# Altium PCB RST32.PcbDoc
Units mm, origin at the board's own origin, x right, y up, seen from the top; angles counter-clockwise.
Board outline 25.5 x 18 mm, 2 copper layers (Top Layer, Bottom Layer); 51 components, 41 nets, 174 pads, 0 vias.
Unrouted connection lines stored in the file: 116.
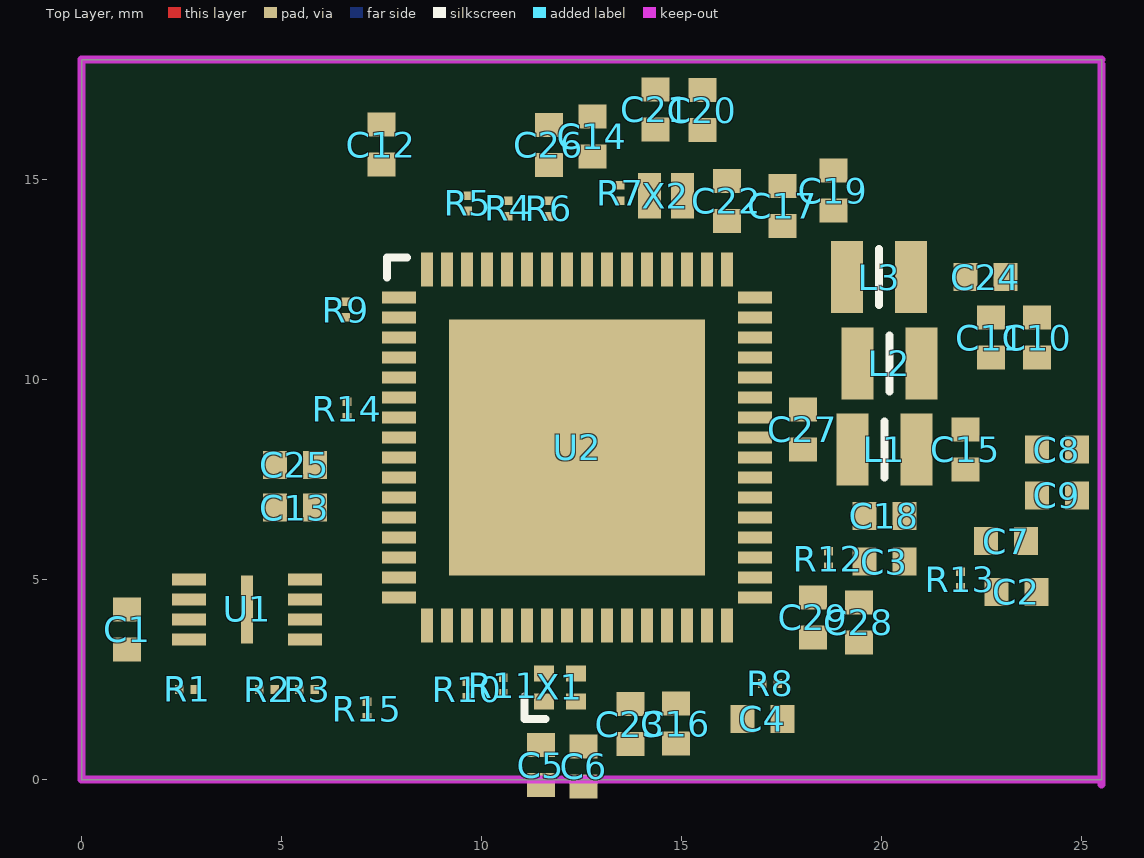
[diagram p0: Top Layer view]
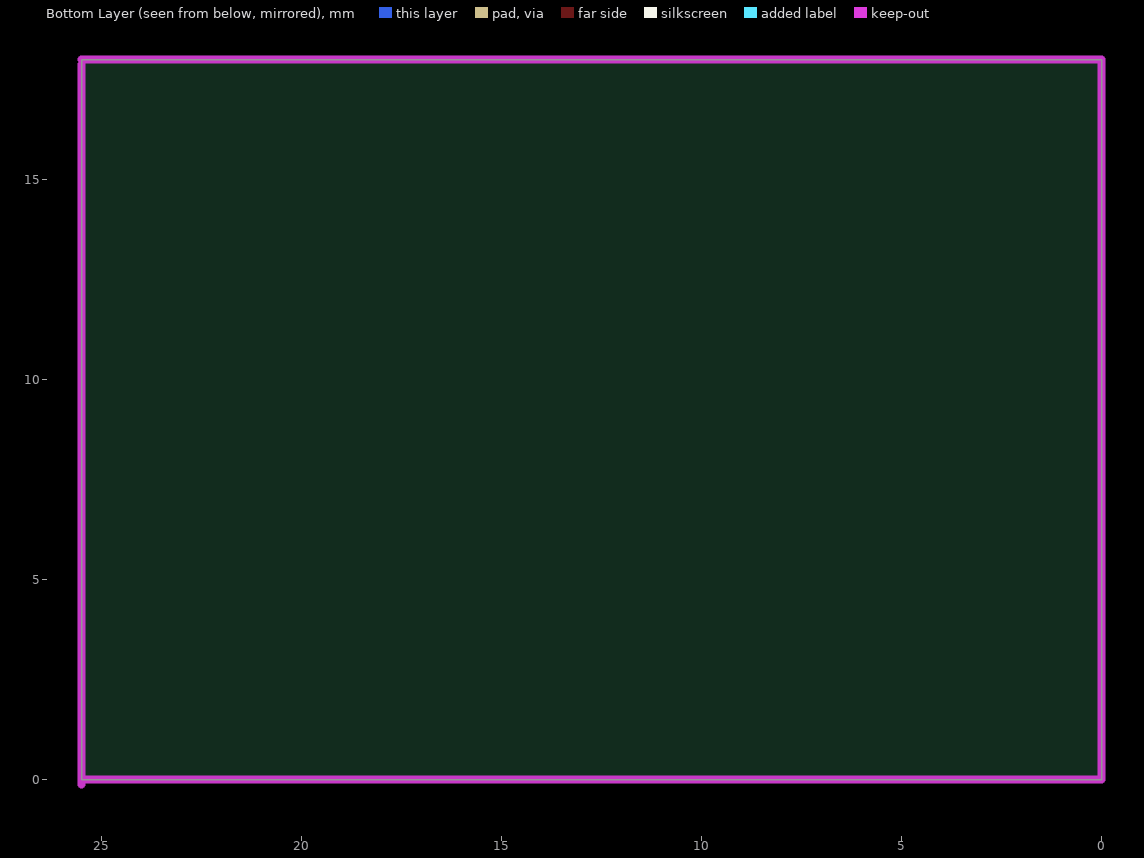
[diagram p1: Bottom Layer view, seen from below]

## Layer stack, top to bottom
Top Solder: solder mask 0.0102, Solder Resist, Dk 3.5
Top Layer: signal copper 0.0356
Dielectric 1: dielectric 0.32, FR-4, Dk 4.8
Bottom Layer: signal copper 0.0356
Bottom Solder: solder mask 0.0102, Solder Resist, Dk 3.5

## Board outline
0,0 25.5,0 25.5,18 0,18

## Design rules (kind name [scope] priority, off if disabled: settings)
Clearance [All] p1: gap=0.254 ignorepadtopadclearanceinfootprint=FALSE except(0.152: SMDPad-SMDPad)
ComponentClearance [All] p1: gap=0.152 collisioncheckmode=3 verticalgap=0.254 showdistances=FALSE
PolygonConnect [All] p1: connectstyle=Relief reliefconductorwidth=0.254 reliefentries=4 polygonreliefangle="90 Angle" airgapwidth=0.254
RoomDefinition CC3135_WIFI [InComponentClass('CC3135_WIFI')] p1: confinementstyle=ConfineIn formatcopy=TRUE lockcomponents=FALSE outline 0.507,-0.727 25.526,-0.727 25.526,17.815 0.507,17.815
RoutingVias [All] p1: holewidth=0.711 width=1.27 viastyle="Through Hole" minholewidth=0.711 minwidth=1.27 maxholewidth=0.711 maxwidth=1.27
SolderMaskExpansion [All] p1: expansion=0.102 istentingtop=FALSE
SupplyNets "Schematic Supply Nets_6" [InNet('WIFI_VDD_RAM')] p1: voltage=0.000
SupplyNets "Schematic Supply Nets_5" [InNet('GND')] p2: voltage=0.000
SupplyNets "Schematic Supply Nets_4" [InNet('WIFI_VDD_PLL')] p3: voltage=0.000
SupplyNets "Schematic Supply Nets_3" [InNet('WIFI_VDD_DIG')] p4: voltage=0.000
SupplyNets "Schematic Supply Nets_2" [InNet('3V3')] p5: voltage=0.000
SupplyNets "Schematic Supply Nets_1" [InNet('WIFI_VDD_ANA')] p6: voltage=0.000
SupplyNets "Schematic Supply Nets" [InNet('WIFI_VDD_PA')] p7: voltage=0.000
Width [All] p1: maxlimit=0.254 minlimit=0.254 preferedwidth=0.254
29 further rules are at their usual default settings.

## Components (designator, comment, footprint, x,y, rotation, side; value= is the part's Value field where it differs from the comment)
C1 "MLCC_0402_(1005)" MLCC_0402_(1005) 1.135,3.754 r90 top
C2 "MLCC_0402_(1005)" MLCC_0402_(1005) 23.368,4.691 r0 top
C3 "MLCC_0402_(1005)" MLCC_0402_(1005) 20.066,5.453 r180 top
C4 "MLCC_0402_(1005)" MLCC_0402_(1005) 17.018,1.516 r0 top
C5 "MLCC_0402_(1005)" MLCC_0402_(1005) 11.484,0.363 r90 top
C6 "MLCC_0402_(1005)" MLCC_0402_(1005) 12.548,0.332 r90 top
C7 "MLCC_0402_(1005)" MLCC_0402_(1005) 23.114,5.961 r0 top
C8 "MLCC_0402_(1005)" MLCC_0402_(1005) 24.384,8.247 r0 top
C9 "MLCC_0402_(1005)" MLCC_0402_(1005) 24.384,7.104 r0 top
C10 "MLCC_0402_(1005)" MLCC_0402_(1005) 23.889,11.047 r270 top
C11 "MLCC_0402_(1005)" MLCC_0402_(1005) 22.733,11.049 r270 top
C12 "MLCC_0402_(1005)" MLCC_0402_(1005) 7.493,15.875 r90 top
C13 "MLCC_0402_(1005)" MLCC_0402_(1005) 5.334,6.801 r180 top
C14 "MLCC_0402_(1005)" MLCC_0402_(1005) 12.769,16.083 r90 top
C15 "MLCC_0402_(1005)" MLCC_0402_(1005) 22.098,8.255 r90 top
C16 "MLCC_0402_(1005)" MLCC_0402_(1005) 14.859,1.397 r90 top
C17 "MLCC_0402_(1005)" MLCC_0402_(1005) 17.526,14.343 r90 top
C18 "MLCC_0402_(1005)" MLCC_0402_(1005) 20.066,6.596 r180 top
C19 "MLCC_0402_(1005)" MLCC_0402_(1005) 18.796,14.724 r90 top
C20 "MLCC_0402_(1005)" MLCC_0402_(1005) 15.519,16.736 r90 top
C21 "MLCC_0402_(1005)" MLCC_0402_(1005) 14.351,16.756 r90 top
C22 "MLCC_0402_(1005)" MLCC_0402_(1005) 16.129,14.47 r90 top
C23 "MLCC_0402_(1005)" MLCC_0402_(1005) 13.716,1.389 r270 top
C24 "MLCC_0402_(1005)" MLCC_0402_(1005) 22.598,12.565 r180 top
C25 "MLCC_0402_(1005)" MLCC_0402_(1005) 5.334,7.866 r180 top
C26 "MLCC_0402_(1005)" MLCC_0402_(1005) 11.684,15.867 r90 top
C27 "MLCC_0402_(1005)" MLCC_0402_(1005) 18.034,8.755 r270 top
C28 "MLCC_0402_(1005)" MLCC_0402_(1005) 19.431,3.929 r270 top
C29 "MLCC_0402_(1005)" MLCC_0402_(1005) 18.288,4.056 r270 top
L1 "LQM2MPN" LQM2MPN 20.066,8.247 r180 top value=2.2uH
L2 "LQM2MPN" LQM2MPN 20.193,10.406 r0 top value=1uH
L3 "LQM2MPN" LQM2MPN 19.939,12.565 r0 top value=2.2uH
R1 "RES_01005_(0402)" RES_01005_(0402) 2.635,2.254 r0 top
R2 "RES_01005_(0402)" RES_01005_(0402) 4.635,2.254 r0 top
R3 "RES_01005_(0402)" RES_01005_(0402) 5.635,2.254 r0 top
R4 "RES_01005_(0402)" RES_01005_(0402) 10.668,14.282 r90 top
R5 "RES_01005_(0402)" RES_01005_(0402) 9.652,14.409 r90 top
R6 "RES_01005_(0402)" RES_01005_(0402) 11.684,14.282 r90 top
R7 "RES_01005_(0402)" RES_01005_(0402) 13.462,14.663 r90 top
R8 "RES_01005_(0402)" RES_01005_(0402) 17.21,2.405 r0 top
R9 "RES_01005_(0402)" RES_01005_(0402) 6.604,11.75 r270 top
R10 "RES_01005_(0402)" RES_01005_(0402) 9.635,2.254 r90 top
R11 "RES_01005_(0402)" RES_01005_(0402) 10.541,2.351 r90 top
R12 "RES_01005_(0402)" RES_01005_(0402) 18.669,5.519 r90 top
R13 "RES_01005_(0402)" RES_01005_(0402) 21.971,5.007 r90 top
R14 "RES_01005_(0402)" RES_01005_(0402) 6.635,9.254 r90 top
R15 "RES_01005_(0402)" RES_01005_(0402) 7.135,1.754 r90 top
U1 "MX25R1635F" MX25R1635FZU 4.135,4.254 r0 top value=16Mbit
U2 "CC3135RNMRGKR" QFN50P900X900X100-65N-D 12.385,8.304 r0 top
X1 "ABM13W" ABM13W 11.957,2.309 r0 top
X2 "ECX-1210" ECX-1210 14.605,14.597 r0 top

## Footprints (in the part's own frame and the unit in brackets; to place one, negate y for a bottom-side part, rotate by r counter-clockwise, add the part's x,y. Pads: shape width x height; smd on the part's side, far side on the other; paste and mask are expansions set on the pad)
ABM13W [mm]
  rect 0.5x0.4 smd mask+0.05: 1(-0.4,-0.35) 2(0.4,-0.35) 3(0.4,0.35) 4(-0.4,0.35)
  silkscreen extent -0.89,-0.79 -0.36,-0.23, body extent -0.6,-0.5 0.6,0.5, height 0.28
ECX-1210 [mm]
  rect 0.575x1.14 smd mask+0.05: 1(-0.413,0) 2(0.413,0)
  body extent -0.6,-0.5 0.6,0.5, height 0.5
LQM2MPN [mm] "0806 Chip Inductor"
  rect 0.8x1.8 smd: 1(-0.8,0) 2(0.8,0)
  silkscreen extent 0,-0.7 0,0.7, body extent -1,-0.8 1,0.8, height 0.9
MLCC_0402_(1005) [mm]
  rect 0.6x0.7 smd: 1(-0.5,0) 2(0.5,0)
  body extent -0.58,-0.32 0.58,0.33, height 0.65
MX25R1635FZU [mm] "1.65V~3.6V 100,000 Cycles 16Mbit 20 Years 3.2ms 80MHz SPI USON-8-EP(2x3) NOR FLASH ROHS"
  rect 0.85x0.3 smd mask+0.05: 1(-1.45,0.75) 2(-1.45,0.25) 3(-1.45,-0.25) 4(-1.45,-0.75) 5(1.45,-0.75) 6(1.45,-0.25) 7(1.45,0.25) 8(1.45,0.75)
  rect 0.3x1.7 smd mask+0.05: 9(0,0)
  body extent -1.55,-1 1.55,1, height 0.6
QFN50P900X900X100-65N-D [mm]
  rect 0.85x0.3 smd mask+0.05: 1(-4.45,3.75) 2(-4.45,3.25) 3(-4.45,2.75) 4(-4.45,2.25) 5(-4.45,1.75) 6(-4.45,1.25) 7(-4.45,0.75) 8(-4.45,0.25) 9(-4.45,-0.25) 10(-4.45,-0.75) 11(-4.45,-1.25) 12(-4.45,-1.75) 13(-4.45,-2.25) 14(-4.45,-2.75) 15(-4.45,-3.25) 16(-4.45,-3.75) 33(4.45,-3.75) 34(4.45,-3.25) 35(4.45,-2.75) 36(4.45,-2.25) 37(4.45,-1.75) 38(4.45,-1.25) 39(4.45,-0.75) 40(4.45,-0.25) 41(4.45,0.25) 42(4.45,0.75) 43(4.45,1.25) 44(4.45,1.75) 45(4.45,2.25) 46(4.45,2.75) 47(4.45,3.25) 48(4.45,3.75)
  rect 0.3x0.85 smd mask+0.05: 17(-3.75,-4.45) 18(-3.25,-4.45) 19(-2.75,-4.45) 20(-2.25,-4.45) 21(-1.75,-4.45) 22(-1.25,-4.45) 23(-0.75,-4.45) 24(-0.25,-4.45) 25(0.25,-4.45) 26(0.75,-4.45) 27(1.25,-4.45) 28(1.75,-4.45) 29(2.25,-4.45) 30(2.75,-4.45) 31(3.25,-4.45) 32(3.75,-4.45) 49(3.75,4.45) 50(3.25,4.45) 51(2.75,4.45) 52(2.25,4.45) 53(1.75,4.45) 54(1.25,4.45) 55(0.75,4.45) 56(0.25,4.45) 57(-0.25,4.45) 58(-0.75,4.45) 59(-1.25,4.45) 60(-1.75,4.45) 61(-2.25,4.45) 62(-2.75,4.45) 63(-3.25,4.45) 64(-3.75,4.45)
  rect 6.4x6.4 smd mask+0.05: 65(0,0)
  silkscreen extent -4.75,4.25 -4.25,4.75, body extent -4.5,-4.5 4.5,4.5, height 1
RES_01005_(0402) [mm] "Chip Resistor, 2-Leads, Body 0.40x0.20mm, IPC High Density"
  rect 0.215x0.22 smd mask+0.05: 1(-0.192,0) 2(0.193,0)
  body extent -0.21,-0.11 0.21,0.11, height 0.16

## Part data
C1 C13 C14 C16 C18 C22 C23 C25 C26: Capacitance=0.1uF, Package=0402, Voltage=10V, Supplier 1=JLCPCB
C2 C3: Capacitance=100pF, Package=0402, Voltage=10V, Supplier 1=JLCPCB
C4: Capacitance=10nF, Package=0402, Voltage=10V, Supplier 1=JLCPCB
C5 C6: Capacitance=6pF, Package=0402, Voltage=10V, Supplier 1=JLCPCB
C7 C8 C10: Capacitance=4.7uF, Dielectric=X5R, Manufacturer 1="Samsung Electro-Mechanics", Manufacturer Part Number 1=CL05A475MQ5NRNC, Package=0402, Supplier Part Number 1=C307423, Voltage=6.3V, Supplier 1=JLCPCB
C9: Capacitance=0.6pF, Package=0402, Voltage=6.3V, Supplier 1=JLCPCB
C11: Capacitance=0.5pF, Package=0402, Voltage=6.3V, Supplier 1=JLCPCB
C12: Capacitance=10uF, Package=0402, Voltage=6.3V, Supplier 1=JLCPCB
C15 C24: Capacitance=10uF, Package=0402, Voltage=10V, Supplier 1=JLCPCB
C17: Capacitance=0.2pF, Package=0402, Voltage=10V, Supplier 1=JLCPCB
C19: Capacitance=0.6pF, Package=0402, Voltage=10V, Supplier 1=JLCPCB
C20 C21: Capacitance=15pF, Package=0402, Voltage=10V, Supplier 1=JLCPCB
C27 C28: Capacitance=22uF, Package=0402, Voltage=10V, Supplier 1=JLCPCB
C29: Capacitance=1uF, Package=0402, Voltage=10V, Supplier 1=JLCPCB
L1 L2 L3: "1.2A 138mΩ 2.2uH 40MHz ±20% 0806 Inductors (SMD) ROHS", Manufacturer 1="Murata Electronics", Manufacturer Part Number 1=LQM2MPN2R2MG0L, Supplier Part Number 1=C86093, Supplier 1=JLCPCB
  L1 L3: DCR=0.11R, Isat=1.2A
  L2: DCR=0.085R, Isat=1.4A
R1 R3 R9: Package=01005, Resistance=10k
R2 R6 R7 R8 R10 R11 R12 R13 R14 R15: Package=01005, Resistance=100k
R4 R5: Package=01005, Resistance=0R
U1: "1.65V~3.6V 100,000 Cycles 16Mbit 20 Years 3.2ms 80MHz SPI NOR FLASH ROHS", Manufacturer 1=MXIC(Macronix), Manufacturer Part Number 1=MX25R1635FZUIL0, Package=USON-8-EP(2x3), Supplier Part Number 1=C152595, Supplier 1=JLCPCB
U2: "-40℃~+85℃ -96dBm 18dBm 2.1V~3.6V 223mA 53mA 72Mbps SPI WiFi VQFN-64-EP(9x9) RF Transceiver ICs ROHS", Manufacturer 1="Texas Instruments", Package=VQFN-64-EP(9x9), Manufacturer Part Number 1=CC3135RNMRGKR
X1: "ABM13W Package", Frequency="40 MHz", Package=SMD1210-2P
X2: "ECX 1210 Package", Frequency=32.768kHz, Manufacturer 1=ECS, Manufacturer Part Number 1=ECS-.327-12.5-1210-TR, Package=SMD1210-2P, Supplier Part Number 1=C435179, Supplier 1=JLCPCB

## Nets (pads, with @x,y where several pads share a name; then routed paths per layer and width w, separated by ;. In a path a pad name is that pad's centre, name@x,y a point inside that pad or via, vN(x,y) a via of type N, cw(c..) or ccw(c..) an arc to the next point about the centre after c; other vN are vias at no path point)
3V3: C1.1 C7.1 C8.1 C9.1 C10.1 C11.1 C12.1 C13.1 C14.1 R1.2 R2.1 R3.2 R6.1 R7.1 R8.1 R9.1 U1.8 U2.10 U2.37 U2.39 U2.44 U2.47 U2.54
GND: C1.2 C2.2 C3.2 C4.2 C5.2 C6.2 C7.2 C8.2 C9.2 C10.2 C11.2 C12.2 C13.2 C14.2 C15.2 C16.2 C17.2 C18.2 C19.2 C20.2 C21.2 C22.2 C23.2 C24.2 C25.2 C26.2 C27.2 C28.2 C29.2 R10.2 R11.2 R12.2 R13.2 R14.2 R15.2 U1.4 U1.9 U2.29 U2.30 U2.65 X1.2 X1.4
NetL1_2: L1.2 U2.38
NetL3_2: L3.2 U2.43
NetR1_1: R1.1 U1.3
NetR3_1: R3.1 U1.7
NetR4_1: R4.1 U2.60
NetR5_1: R5.1 U2.62
NetR10_1: R10.1 U2.19
PA_SWN: L2.1 U2.41
PA_SWP: L2.2 U2.40
WIFI_FLASH_MISO: U1.2 U2.13
WIFI_FLASH_MOSI: U1.5 U2.12
WIFI_FLASH_NCS: R2.2 U1.1 U2.14
WIFI_FLASH_SCLK: U1.6 U2.11
WIFI_HS_N: C5.1 U2.22 X1.1
WIFI_HS_P: C6.1 U2.23 X1.3
WIFI_INTR: R15.1 U2.15
WIFI_LS_N: C20.1 U2.52 X2.1
WIFI_LS_P: C21.1 U2.51 X2.2
WIFI_NHIB: R9.2 U2.2
WIFI_NRST: C4.1 R8.2 U2.32
WIFI_NWP_LOG_TX: R5.2
WIFI_RF_A_RX: U2.27
WIFI_RF_A_TX: U2.28
WIFI_RF_BG: U2.31
WIFI_SOP0: C2.1 R13.1 U2.35
WIFI_SOP1: C3.1 R12.1 U2.34
WIFI_SOP2: R11.1 U2.21
WIFI_SPI_CLK: U2.5
WIFI_SPI_MISO: R14.1 U2.7
WIFI_SPI_MOSI: U2.6
WIFI_SPI_NCS: U2.8
WIFI_UART_RX: R6.2 U2.57
WIFI_UART_TX: R7.2 U2.55
WIFI_VDD_ANA: C15.1 C16.1 C17.1 C18.1 C19.1 L1.1 U2.25 U2.36 U2.48
WIFI_VDD_DIG: C24.1 C25.1 C26.1 L3.1 U2.9 U2.56
WIFI_VDD_PA: C27.1 C28.1 C29.1 U2.33 U2.42
WIFI_VDD_PLL: C23.1 U2.24
WIFI_VDD_RAM: C22.1 U2.49
WIFI_WL_LOG_TX: R4.2
pads on no net: U2.1 U2.3 U2.4 U2.16 U2.17 U2.18 U2.20 U2.26 U2.45 U2.46 U2.50 U2.53 U2.58 U2.59 U2.61 U2.63 U2.64

## Keep-outs
Keep-Out Layer:
  lines w0.2: 25.5,-0.127 25.5,17.873 ; 25.5,0 0,0 0,18 25.5,18

## Silkscreen, mask and mechanical layers (free items; w line width, h text height)
Dimensions:
  rectangle: -48.571,-77.985 -45.396,-74.81
  rectangle: -45.396,-81.16 -35.871,-77.985
  lines w0.1: 0,0 0,18 ; 0.635,0.754 10.635,0.754
  lines w0.178: -48.571,-77.985 -23.171,-77.985 ; -45.396,-81.16 -45.396,-74.81 ; -42.221,-81.16 -42.221,-74.81 ; -35.871,-81.16 -35.871,-74.81 ; -29.521,-81.16 -29.521,-74.81 ; -48.571,-81.16 -48.571,-74.81 -23.171,-74.81 -23.171,-81.16 -48.571,-81.16
Route Tool Path:
  lines w0.254: -55.5,-37.5 -50.5,-37.5 ; -55.5,15 -50.5,15 ; -55.5,67.5 -50.5,67.5 ; -6,-90 -6,-85 ; -6,115 -6,120 ; 43.5,-90 43.5,-85 ; 43.5,115 43.5,120 ; 93,-90 93,-85 ; 93,115 93,120 ; 142.5,-90 142.5,-85 ; 142.5,115 142.5,120 ; 192,-90 192,-85 ; 192,115 192,120 ; 236.5,-39.5 241.5,-39.5 ; 236.5,13 241.5,13 ; 236.5,65.5 241.5,65.5 ; -55.5,-90 241.5,-90 241.5,120 -55.5,120 -55.5,-90 ; -50.5,-85 236.5,-85 236.5,115 -50.5,115 -50.5,-85
  text "1" at -30.75,116.5 h1.78
  text "2" at 18.75,116.5 h1.78
  text "3" at 68.25,116.5 h1.78
  text "4" at 117.75,116.5 h1.78
  text "5" at 167.25,116.5 h1.78
  text "6" at 216.75,116.5 h1.78
  text "A" at -53.5,93.625 h1.78
  text "A" at 238.5,93.625 h1.78
  text "B" at 140,48.125 h1.78
  text "B" at -53.5,41.125 h1.78
  text "D" at 212.5,40.625 h1.78
  text "C" at -53.5,-11.375 h1.78
  text "C" at 238.5,-11.375 h1.78
  text "D" at -53.5,-63.875 h1.78
  text "1" at -30.75,-88.5 h1.78
  text "2" at 18.75,-88.5 h1.78
  text "3" at 68.25,-88.5 h1.78
  text "4" at 117.75,-88.5 h1.78
  text "5" at 167.25,-88.5 h1.78
  text "6" at 216.75,-88.5 h1.78
Fab Notes:
  lines w0.178: -38.717,-36.662 -42.915,-36.662 -42.915,-22.746 -38.717,-22.746
  lines w0.254: -47.174,109.28 -26.134,109.28 ; -47.565,104.568 -43.852,104.568 -43.852,108.282 -47.565,108.282 -47.565,104.568 ; -43.84,-2.77 -43.84,-0.321 -41.493,-0.321 -41.493,-2.77 -43.84,-2.77
  text "FAB NOTES :" at -46.956,110.342 h2.03
  text "1. EXPOSED COPPER ARE PRESENT AT BOARD EDGE IN ALL ELECTRICAL LAYERS AT \"LOCATION A\". THIS IS BY DESIGN. RUN AS IT IS. copper in  /  that area must be as close to the edge as current processing allows" at -46.477,100.761 h2.03
  text "2. THE SOLDER MASK IMAGES THAT ARE THE SAME SIZE AS THE COMPONENT PADS MAY BE ENLARGED AS PER THE MANUFACTURING CAPABILITIES." at -46.503,96.915 h2.03
  text "ALL OTHER SOLDER MASK IMAGES SHALL NOT BE MODIFIED." at -40.746,93.137 h2.03
M12 Board Stackup:
  lines w0.152: 122.695,-75.751 235.35,-75.751 ; 139.571,-83.207 139.571,-68.094 ; 167.03,-83.218 167.03,-68.118 ; 180.617,-83.234 180.617,-68.121 ; 211.202,-83.267 211.202,-68.154 ; 122.695,-83.244 235.349,-83.244 235.349,-68.131 122.695,-68.131 122.695,-83.244
  lines w0.254: 147.5,-39 233.5,-39
  lines w0.381: 148.088,-64.144 158.5,-64.144 182.116,-64.144 203.954,-64.144 220.459,-64.144 234.934,-64.144 ; 148.088,-61.096 158.5,-61.096 182.116,-61.096 203.954,-61.096 220.459,-61.096 234.934,-61.096 ; 148.088,-58.048 158.5,-58.048 182.116,-58.048 203.954,-58.048 220.459,-58.048 234.934,-58.048 ; 148.088,-55 158.5,-55 182.116,-55 203.954,-55 220.459,-55 234.934,-55 ; 148.088,-51.952 158.5,-51.952 182.116,-51.952 203.954,-51.952 220.459,-51.952 234.934,-51.952 ; 148.088,-48.904 158.5,-48.904 182.116,-48.904 203.954,-48.904 220.459,-48.904 234.934,-48.904 ; 148.088,-45.856 234.934,-45.856 ; 158.5,-42.808 158.5,-67.192 ; 182.116,-42.808 182.116,-67.192 ; 203.954,-42.808 203.954,-67.192 ; 220.459,-42.808 220.459,-67.192 ; 158.5,-67.192 182.116,-67.192 ; 158.5,-67.192 148.088,-67.192 148.088,-42.808 234.934,-42.808 234.934,-67.192 220.459,-67.192 ; 182.116,-67.192 203.954,-67.192 ; 203.954,-67.192 220.459,-67.192
  text "LAYER STACKUP & IMPEDANCE TABLE" at 148.5,-38 h3.17
  text "THIS IS AN IMPEDANCE CONTROLLED BOARD" at 147.5,-42 h2
  text "Layer" at 149.866,-45.094 h1.52
  text "Name" at 160.278,-45.094 h1.52
  text "Material" at 183.894,-45.094 h1.52
  text "Thickness" at 205.732,-45.094 h1.52
  text "Constant" at 222.237,-45.094 h1.52
  text "Top Overlay" at 160.278,-48.142 h1.52
  text "Top Solder" at 160.278,-51.19 h1.52
  text "Solder Resist" at 183.894,-51.19 h1.52
  text "0.40mil" at 205.732,-51.19 h1.52
  text "3.5" at 222.237,-51.19 h1.52
  text "1" at 149.866,-54.238 h1.52
  text "Top Layer" at 160.278,-54.238 h1.52
  text "1.40mil" at 205.732,-54.238 h1.52
  text "Dielectric 1" at 160.278,-57.286 h1.52
  text "FR-4" at 183.894,-57.286 h1.52
  text "12.60mil" at 205.732,-57.286 h1.52
  text "4.8" at 222.237,-57.286 h1.52
  text "2" at 149.866,-60.334 h1.52
  text "Bottom Layer" at 160.278,-60.334 h1.52
  text "1.40mil" at 205.732,-60.334 h1.52
  text "Bottom Solder" at 160.278,-63.382 h1.52
  text "Solder Resist" at 183.894,-63.382 h1.52
  text "0.40mil" at 205.732,-63.382 h1.52
  text "3.5" at 222.237,-63.382 h1.52
  text "Bottom Overlay" at 160.278,-66.43 h1.52
  text "COPLANAR" at 167.433,-71.088 h1.78
  text "LAYER NO" at 125.299,-73.761 h1.78
  text "CONDUCTOR WIDTH" at 141.695,-73.761 h1.78
  text "IMPEDANCE +/-10%" at 183.988,-73.761 h1.78
  text "REFERENCE GND" at 213.986,-73.761 h1.78
  text "SPACING" at 168.891,-74.437 h1.78
  text "15mil" at 148.994,-80.59 h1.78
  text "10mil" at 170.611,-80.602 h1.78
  text "1" at 128.081,-80.653 h1.78
  text "(TOP)" at 130.621,-80.653 h1.78
  text "GND" at 220.316,-80.653 h1.78
  text "50ohm" at 190.274,-80.736 h1.78
Drill Drawing:
  lines w0.155: -48.172,85.849 -16.528,85.849
  lines w0.381: -34.317,77.19 -34.317,84.81 ; -23.296,77.19 -23.296,84.81 ; -4.962,77.19 -4.962,84.81 ; 7.887,77.19 7.887,84.81 ; 26.525,77.19 26.525,84.81 ; 56.743,77.19 56.743,84.81 ; 71.725,77.19 71.725,84.81 ; 90.668,77.19 90.668,84.81 ; 107.174,77.19 107.174,84.81 ; 128.859,77.19 128.859,84.81 ; 162.733,77.19 162.733,84.81 ; -48.309,77.19 197.75,77.19 197.75,84.81 -48.309,84.81 -48.309,77.19 ; -48.309,81 197.75,81 -48.309,81
  text "DRILL CHART :" at -47.921,86.811 h2.54
  text "Symbol" at -46.023,82.143 h1.83
  text "Count" at -33.174,82.143 h1.83
  text "Hole Size" at -22.153,82.143 h1.83
  text "Plated" at -3.819,82.143 h1.83
  text "Hole Type" at 9.03,82.143 h1.83
  text "Drill Layer Pair" at 27.668,82.143 h1.83
  text "Via/Pad" at 57.886,82.143 h1.83
  text "Pad Shape" at 72.868,82.143 h1.83
  text "Template" at 91.811,82.143 h1.83
  text "Description" at 108.317,82.143 h1.83
  text "Hole Tolerance (+)" at 130.002,82.143 h1.83
  text "Hole Tolerance (-)" at 163.876,82.143 h1.83

## Dimensions
25.5,0 to 25.5,17.873 on Dimensions
-48.571,-81.16 to -23.171,-81.16 on Dimensions
0,18 to 25.5,0 on Dimensions
0,0 to -1.171,-1.955 on Dimensions
-42.853,-20.99 to -42.684,-19.425 on Fab Notes